# EAGLE board OOBD-Cup_v6 (EAGLE 6.4)

Size 160 x 100 mm. Coordinates in mm from the lower left corner, seen from the top.
Outline: 0,0 160,0 160,100 0,100 0,0
Copper layers (1*16): Top 0.035mm / dielectric 1.5mm / Bottom 0.035mm
Design rules "default": minimum track width 10mil, minimum drill 24mil, track to track 8mil, track to pad 8mil, pad to pad 8mil, via to via 8mil, smd to smd 8mil, copper to edge 40mil, drill to drill 8mil, minimum pad ring 10mil, minimum via ring 8mil, stop-mask expansion 4mil, vias tented up to drill 0mil, thermal gap 10mil

## Footprints (pad centres in the part's own frame; a part is rotated, then mirrored left to right if it is on the bottom)
C0603 = smd 1.1 x 1: 1 -0.85,0; 2 0.85,0
C0603K = smd 1.05 x 1.08: 1 -0.875,0; 2 0.875,0
C6032-TE-C = smd 2.54 x 2.794: + 2.857,0; - -2.857,0
SV-D = smd 3.302 x 1.27: + -2.54,0; - 2.54,0
MINIMELF = smd 1.4 x 1.8: A 1.7,0; C -1.7,0
SMB = smd 2.4 x 2.4: A 2.2,0; C -2.2,0
SOT23-5L = smd 0.55 x 1.2: 1 -0.95,-1.3; 2 0,-1.3; 3 0.95,-1.3; 4 0.95,1.3; 5 -0.95,1.3
BTM-182 = smd 1.676 x 0.813: P$1 -7.62,7.62; P$2 -7.62,6.35; P$3 -7.62,5.08; P$4 -7.62,3.81; P$5 -7.62,2.54; P$6 -7.62,1.27; P$7 -7.62,0; P$8 -7.62,-1.27; P$9 -7.62,-2.54; P$10 -7.62,-3.81; P$11 -7.62,-5.08; P$12 -7.62,-6.35; P$13 -7.62,-7.62; P$14 -7.62,-8.89; P$15 -7.62,-10.16; P$16 7.62,-10.16; P$17 7.62,-8.89; P$18 7.62,-7.62; P$19 7.62,-6.35; P$20 7.62,-5.08; P$21 7.62,-3.81; P$22 7.62,-2.54; P$23 7.62,-1.27; P$24 7.62,0; P$25 7.62,1.27; P$26 7.62,2.54; P$27 7.62,3.81; P$28 7.62,5.08; P$29 7.62,6.35; P$30 7.62,7.62 | smd 0.813 x 1.676: P$31 -4.445,8.255; P$32 -5.715,8.255
SO08 = smd 0.66 x 2.032: 1 -1.905,-3.073; 2 -0.635,-3.073; 3 0.635,-3.073; 4 1.905,-3.073; 5 1.905,3.073; 6 0.635,3.073; 7 -0.635,3.073; 8 -1.905,3.073
SO8 = smd 0.66 x 2.032: 1 -1.905,-3.073; 2 -0.635,-3.073; 3 0.635,-3.073; 4 1.905,-3.073; 5 1.905,3.073; 6 0.635,3.073; 7 -0.635,3.073; 8 -1.905,3.073
SO08' = smd 0.6 x 2.2: 1 -1.905,-2.6; 2 -0.635,-2.6; 3 0.635,-2.6; 4 1.905,-2.6; 5 1.905,2.6; 6 0.635,2.6; 7 -0.635,2.6; 8 -1.905,2.6
JP5Q = drill 0.914 octagon: 1 -5.08,-1.27; 2 -5.08,1.27; 3 -2.54,-1.27; 4 -2.54,1.27; 5 0,-1.27; 6 0,1.27; 7 2.54,-1.27; 8 2.54,1.27; 9 5.08,-1.27; 10 5.08,1.27
JP4 = drill 0.914 long: 1 -3.81,0; 2 -1.27,0; 3 1.27,0; 4 3.81,0
JP3Q = drill 0.914 octagon: 1 -2.54,-1.27; 2 -2.54,1.27; 3 0,-1.27; 4 0,1.27; 5 2.54,-1.27; 6 2.54,1.27
JP1 = drill 0.914 long: 1 0,-1.27; 2 0,1.27
PIS2408 = smd 1.9 x 1.4: P$1 0,2.75; P$2 0,-2.75
07HCP-XXXX-50 = drill 1.1 long: 1 -2.5,0; 2 2.5,0
DUOLED2X5 = drill 0.813 long: AG -2.54,0; AR 2.54,0; K 0,0
U57X32 = drill 0.813 long: A -1.27,0; K 1.27,0
CTS406 = smd 1.9 x 1.4: 1 -2.2,-1.2; 2 2.2,-1.2; 3 2.2,1.2; 4 -2.2,1.2
R0603 = smd 1 x 1.1: 1 -0.85,0; 2 0.85,0
R0805 = smd 1.3 x 1.5: 1 -0.95,0; 2 0.95,0
FTR-B4GA = smd 0.8 x 3.1: 1 -3.8,-3.167; 2 -0.625,-3.167; 3 1.597,-3.167; 4 3.82,-3.167; 5 3.82,2.23; 6 1.597,2.23; 7 -0.625,2.23; 8 -3.8,2.23
BME0603SA = smd 2 x 2: (+)LEAD 4.295,0.425; (-)LEAD -0.475,0.425; NC -0.475,-4.345
SOT23 = smd 1 x 1.4: 1 -0.95,-1.1; 2 0.95,-1.1; 3 0,1.1
VFQFPN36 = smd 0.6 x 0.23: 1 -2.7,2; 2 -2.7,1.5; 3 -2.7,1; 4 -2.7,0.5; 5 -2.7,0; 6 -2.7,-0.5; 7 -2.7,-1; 8 -2.7,-1.5; 9 -2.7,-2; 19 2.7,-2; 20 2.7,-1.5; 21 2.7,-1; 22 2.7,-0.5; 23 2.7,0; 24 2.7,0.5; 25 2.7,1; 26 2.7,1.5; 27 2.7,2 | smd 0.23 x 0.6: 10 -2,-2.7; 11 -1.5,-2.7; 12 -1,-2.7; 13 -0.5,-2.7; 14 0,-2.7; 15 0.5,-2.7; 16 1,-2.7; 17 1.5,-2.7; 18 2,-2.7; 28 2,2.7; 29 1.5,2.7; 30 1,2.7; 31 0.5,2.7; 32 0,2.7; 33 -0.5,2.7; 34 -1,2.7; 35 -1.5,2.7; 36 -2,2.7

## Placement (x,y rotation side)
C1  100nF  [C0603]  -26.67,66.04 0 top  (outside the outline)
C2  100nF  [C0603]  -44.45,71.12 0 top  (outside the outline)
C3  15p  [C0603]  -31.75,72.39 0 top  (outside the outline)
C4  15p  [C0603]  -36.83,72.39 0 top  (outside the outline)
C5  100nF  [C0603]  -52.07,71.12 0 top  (outside the outline)
C6  100nF  [C0603]  -59.69,71.12 0 top  (outside the outline)
C7  100nF  [C0603]  -33.02,66.04 0 top  (outside the outline)
C8  100nF  [C0603]  -39.37,66.04 0 top  (outside the outline)
C9  10nF  [C0603]  -16.51,72.39 0 top  (outside the outline)
C10  100nF  [C0603]  -45.72,66.04 0 top  (outside the outline)
C11  100nF  [C0603]  -52.07,66.04 0 top  (outside the outline)
C12  1µF  [C0603K]  -26.67,82.55 0 top  (outside the outline)
C13  100nF  [C0603]  -58.42,66.04 0 top  (outside the outline)
C14  220µF  [C6032-TE-C]  -17.78,52.07 0 top  (outside the outline)
C15  220pF  [C0603K]  -16.51,82.55 0 top  (outside the outline)
C16  100nF  [C0603]  -64.77,66.04 0 top  (outside the outline)
C17  47µ/35V  [SV-D]  -31.75,52.07 0 top  (outside the outline)
C18  100nF  [C0603K]  -22.86,82.55 0 top  (outside the outline)
C19  100nF  [C0603]  -71.12,66.04 0 top  (outside the outline)
C20  100n  [C0603]  -21.59,72.39 0 top  (outside the outline)
C21  100n  [C0603]  -26.67,72.39 0 top  (outside the outline)
D1  1N4148  [MINIMELF]  -24.13,59.69 0 top  (outside the outline)
D2  B140  [SMB]  -24.13,43.18 0 top  (outside the outline)
D3  B140  [SMB]  -31.75,43.18 0 top  (outside the outline)
IC1  24LC16  [SOT23-5L]  -40.64,43.18 0 top  (outside the outline)
IC2  BTM-182  [BTM-182]  -21.59,11.43 0 top  (outside the outline)
IC3  PCA82C250T  [SO08]  -35.56,5.08 0 top  (outside the outline)
IC4  MC34063-SO  [SO8]  -45.72,5.08 0 top  (outside the outline)
IC5  78L05SMD  [SO08']  -17.78,30.48 0 top  (outside the outline)
IC$1  SI9243AEY  [SO08]  -55.88,5.08 0 top  (outside the outline)
JP1  Program  [JP5Q]  -66.04,-5.08 0 top  (outside the outline)
JP1-OBD1  [JP4]  -41.91,50.8 0 top  (outside the outline)
JP2  ext. WLAN  [JP3Q]  -78.74,-3.81 0 top  (outside the outline)
JP2-OBD1  [JP4]  -53.34,50.8 0 top  (outside the outline)
JP3  [JP1]  -36.83,59.69 0 top  (outside the outline)
L1  47uH  [PIS2408]  -25.4,31.75 0 top  (outside the outline)
L2  47µH  [07HCP-XXXX-50]  -64.77,6.35 0 top  (outside the outline)
LED1  Rt/Gr  [DUOLED2X5]  -30.48,59.69 0 top  (outside the outline)
LED2  Blue  [U57X32]  -36.83,82.55 0 top  (outside the outline)
Q1  8MHz  [CTS406]  -16.51,43.18 0 top  (outside the outline)
R1  130k  [R0603]  -55.88,58.42 0 top  (outside the outline)
R2  27k  [R0603]  -66.04,58.42 0 top  (outside the outline)
R3  10k  [R0603]  -71.12,58.42 0 top  (outside the outline)
R4  10k  [R0603]  -15.24,66.04 0 top  (outside the outline)
R5  10k  [R0603]  -67.31,77.47 0 top  (outside the outline)
R6  10k  [R0603]  -72.39,77.47 0 top  (outside the outline)
R7  82R  [R0603]  -16.51,77.47 0 top  (outside the outline)
R8  82R  [R0603]  -21.59,77.47 0 top  (outside the outline)
R9  4k7  [R0603]  -20.32,66.04 0 top  (outside the outline)
R10  4k7  [R0603]  -26.67,77.47 0 top  (outside the outline)
R11  4k7  [R0603]  -60.96,58.42 0 top  (outside the outline)
R12  510R  [R0603]  -66.04,71.12 0 top  (outside the outline)
R13  4k7  [R0603]  -36.83,77.47 0 top  (outside the outline)
R14  4k7  [R0603]  -31.75,77.47 0 top  (outside the outline)
R15  4k7  [R0603]  -41.91,77.47 0 top  (outside the outline)
R16  4k7  [R0603]  -46.99,77.47 0 top  (outside the outline)
R17  180k  [R0603]  -72.39,71.12 0 top  (outside the outline)
R18  47k  [R0603]  -52.07,77.47 0 top  (outside the outline)
R19  120R  [R0603]  -44.45,58.42 0 top  (outside the outline)
R20  510R  [R0603]  -50.8,58.42 0 top  (outside the outline)
R21  3k3  [R0603]  -57.15,77.47 0 top  (outside the outline)
R22  1R  [R0805]  -62.23,50.8 0 top  (outside the outline)
R23  1R  [R0805]  -68.58,50.8 0 top  (outside the outline)
R24  1R  [R0805]  -16.51,59.69 0 top  (outside the outline)
R25  5k6  [R0603]  -62.23,77.47 0 top  (outside the outline)
REL1  FTR-B4GA  [FTR-B4GA]  -45.72,33.02 0 top  (outside the outline)
SG1  MBWOE  [BME0603SA]  -58.42,33.02 0 top  (outside the outline)
T1  BC817  [SOT23]  -48.26,41.91 0 top  (outside the outline)
T2  BC817  [SOT23]  -63.5,41.91 0 top  (outside the outline)
T3  BC817  [SOT23]  -55.88,41.91 0 top  (outside the outline)
T4  BC817  [SOT23]  -71.12,41.91 0 top  (outside the outline)
U1  STM32F10XTXU6  [VFQFPN36]  -67.31,30.48 0 top  (outside the outline)

## Library data of the parts
C1 C3 C4 C7-C11 C13 C16 C19-C21 R1-R4 R9 R11 R19 R20 = resistor
C2 C5 C6 C12 C15 C18 R5-R8 R10 R12-R18 R21-R25 = rcl
C14 = rc-master
C17 = cap-master
D1-D3 = diode
IC1 = microchip; MF: MICROCHIP; MPN: 24LC00T-I/OT; OC_FARNELL: 9757864; OC_NEWARK: 62K0574
IC2 = BTM182
IC3 = can
IC4 = mc34063
IC5 = linear
IC$1 = Vishay_ISO9141
JP1 JP1-OBD1 JP2 JP2-OBD1 JP3 = jumper
L1 L2 = Inductor-Fastron
LED1 LED2 = led
Q1 = crystal; OC_FARNELL: unknown; OC_NEWARK: unknown
REL1 = relay; MN: Fujitsu; MPN: FTR-B4GAxxxZ; OC_REICHELT: FTR-B4GA 12V
SG1 = buzzer; MF: Grewus
T1-T4 = transistor
U1 = stm32

## Nets
3V3_BTM182: C5.1 C6.1 IC2.P$14 IC2.P$16 JP1.9
+3V3: C2.1 C10.1 C11.1 C12.1 C13.1 C14.+ C16.1 IC1.4 JP1.8 JP1.10 L1.P$1 L2.1 R3.2 R9.2 R11.2 R25.2 SG1.(+)LEAD U1.1 U1.6 U1.19 U1.27
+5V: C7.1 C19.1 C21.1 IC3.3 IC5.1 IC$1.3
+12V: C17.+ C18.1 C20.1 D1.C D3.C IC4.6 IC5.8 JP2.2 LED2.A R1.2 R22.2 R23.2 R24.2 REL1.1
BOOT0: JP1.7 R4.2 U1.35
BT_RES-: IC2.P$21 U1.29
BTM_RX: IC2.P$10 JP1.1
BTM_TX: IC2.P$9 JP1.3
BUZZER: R13.1 U1.13
CAN-RXD: IC3.4 U1.23
CAN-TXD: IC3.1 U1.24
CAN_SW: R16.1 U1.30
GND: C1.2 C2.2 C3.1 C4.1 C5.2 C6.2 C7.2 C8.2 C9.2 C10.2 C11.2 C12.2 C13.2 C14.- C15.2 C16.2 C17.- C18.2 C19.2 C20.2 C21.2 D2.A IC1.2 IC2.P$15 IC3.2 IC3.8 IC4.4 IC5.2 IC5.3 IC5.6 IC5.7 IC$1.5 JP1.6 JP2-OBD1.3 JP2.5 LED1.K R2.1 R4.1 R5.2 R6.2 R18.1 R21.2 T1.2 T2.2 T3.2 T4.2 U1.5 U1.17 U1.18 U1.26 U1.36
HS_CAN-H: JP1-OBD1.1 REL1.2
HS_CAN-L: JP1-OBD1.2 REL1.7
K-LINE: C9.1 IC$1.6 JP2-OBD1.2 R20.1
L-LINE: JP2-OBD1.1 R12.1 T1.3
LED1: R8.1 U1.32
LED1_GR: JP2.1 LED1.AG R7.2
LED1_RT: JP2.3 LED1.AR R8.2
LED2: R7.1 U1.31
LED2_BL: JP2.4 LED2.K R15.1
LED_BLUE: R14.1 U1.14
MODE1: R6.1 U1.25
MS_CAN-H: JP1-OBD1.3 REL1.4
MS_CAN-L: JP1-OBD1.4 REL1.5
N$1: C4.2 Q1.1 U1.2
N$2: C3.2 Q1.3 U1.3
N$3: IC3.6 JP3.1 REL1.6
N$5: IC3.7 R19.2 REL1.3
N$8: R10.1 U1.11
N$9: R14.2 T3.1
N$10: R15.2 T3.3
N$11: C15.1 IC4.3
N$12: IC4.1 IC4.7 IC4.8 R22.1 R23.1 R24.1
N$13: IC4.5 R21.1 R25.1
N$14: D2.C IC4.2 L1.P$2 L2.2
N$15: C1.1 R1.1 R2.2 U1.15
N$16: JP3.2 R19.1
N$17: R10.2 T1.1
N$18: R5.1 U1.28
N$19: IC1.1 R9.1 U1.33
N$20: R16.2 T4.1
N$21: IC1.3 R11.1 U1.34
N$23: SG1.(-)LEAD T2.3
N$24: R13.2 T2.1
N$27: D1.A R17.2 REL1.8 T4.3
REL_DIAG: R17.1 R18.2 U1.16
RESET-: JP1.5 R3.1 U1.4
RX_K: IC$1.1 U1.10
STM_RXD: JP1.4 U1.22
STM_TXD: JP1.2 U1.21
TX: IC$1.4 U1.9
VBAT: C8.1 D3.A IC$1.7 JP2-OBD1.4 JP2.6 R12.2 R20.2

## Tracks (layer width: path | path; a pad name or v marks a point on that pad's centre or on a via)
3V3_BTM182  (4 unrouted)
+3V3  (20 unrouted)
+5V  (5 unrouted)
+12V  (13 unrouted)
BOOT0  (2 unrouted)
BT_RES-  (1 unrouted)
BTM_RX  (1 unrouted)
BTM_TX  (1 unrouted)
BUZZER  (1 unrouted)
CAN-RXD  (1 unrouted)
CAN-TXD  (1 unrouted)
CAN_SW  (1 unrouted)
GND  (50 unrouted)
HS_CAN-H  (1 unrouted)
HS_CAN-L  (1 unrouted)
K-LINE  (3 unrouted)
L-LINE  (2 unrouted)
LED1  (1 unrouted)
LED1_GR  (2 unrouted)
LED1_RT  (2 unrouted)
LED2  (1 unrouted)
LED2_BL  (2 unrouted)
LED_BLUE  (1 unrouted)
MODE1  (1 unrouted)
MS_CAN-H  (1 unrouted)
MS_CAN-L  (1 unrouted)
N$1  (2 unrouted)
N$2  (2 unrouted)
N$3  (2 unrouted)
N$5  (2 unrouted)
N$8  (1 unrouted)
N$9  (1 unrouted)
N$10  (1 unrouted)
N$11  (1 unrouted)
N$12  (5 unrouted)
N$13  (2 unrouted)
N$14  (3 unrouted)
N$15  (3 unrouted)
N$16  (1 unrouted)
N$17  (1 unrouted)
N$18  (1 unrouted)
N$19  (2 unrouted)
N$20  (1 unrouted)
N$21  (2 unrouted)
N$23  (1 unrouted)
N$24  (1 unrouted)
N$27  (3 unrouted)
REL_DIAG  (2 unrouted)
RESET-  (2 unrouted)
RX_K  (1 unrouted)
STM_RXD  (1 unrouted)
STM_TXD  (1 unrouted)
TX  (1 unrouted)
VBAT  (6 unrouted)